# Altium PCB PCB1.PcbDoc
Units mm, origin at the board's own origin, x right, y up, seen from the top; angles counter-clockwise.
Board outline 152.4 x 101.6 mm, 2 copper layers (Top Layer, Bottom Layer); 18 components, 26 nets, 97 pads, 0 vias.
Unrouted connection lines stored in the file: 56.
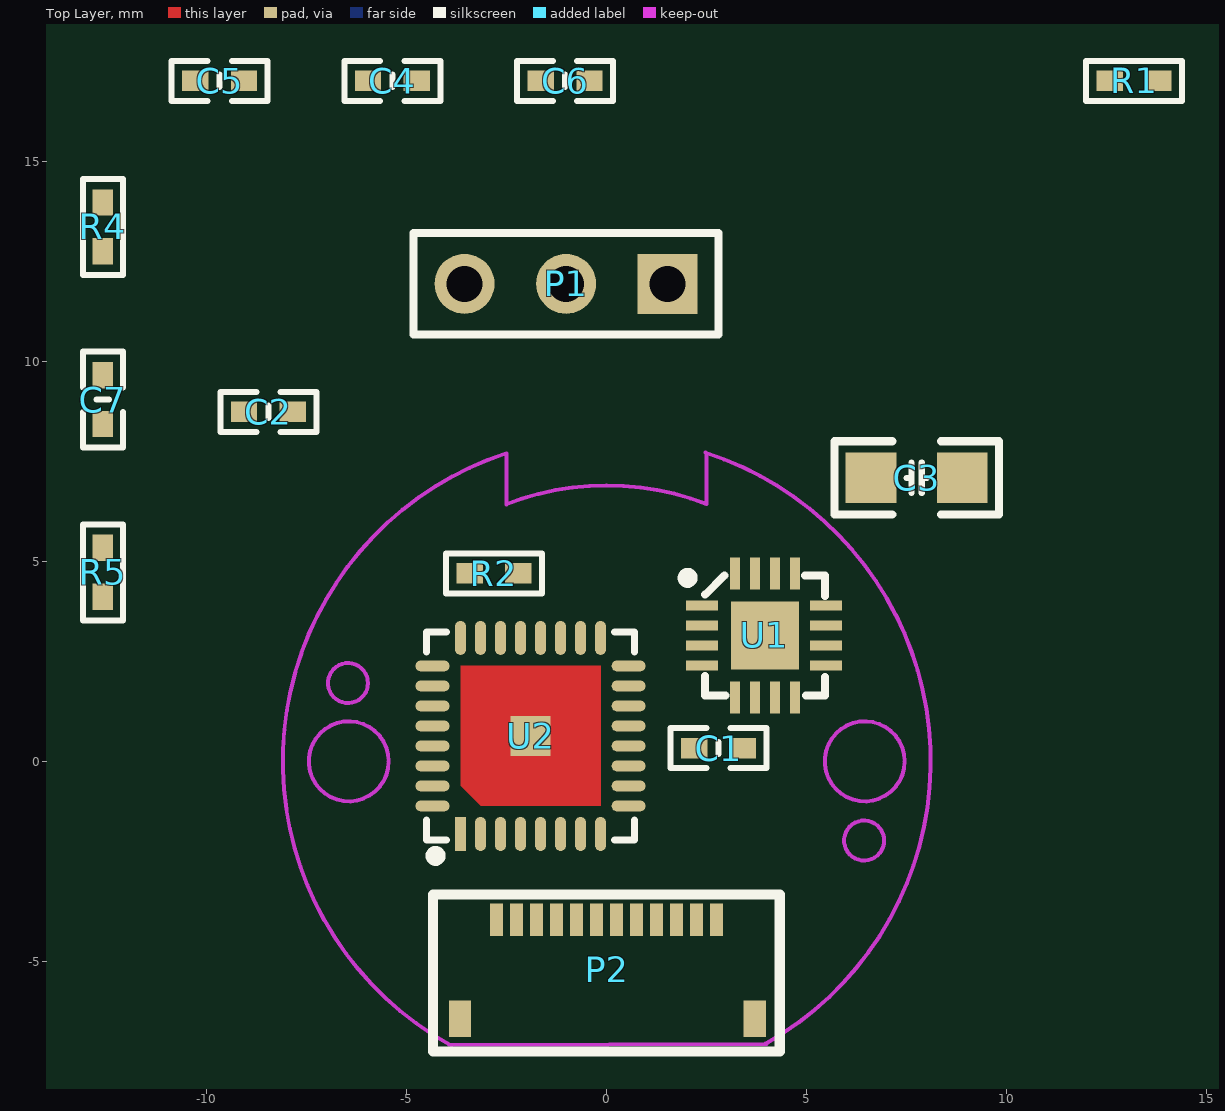
[diagram p0: Top Layer view]
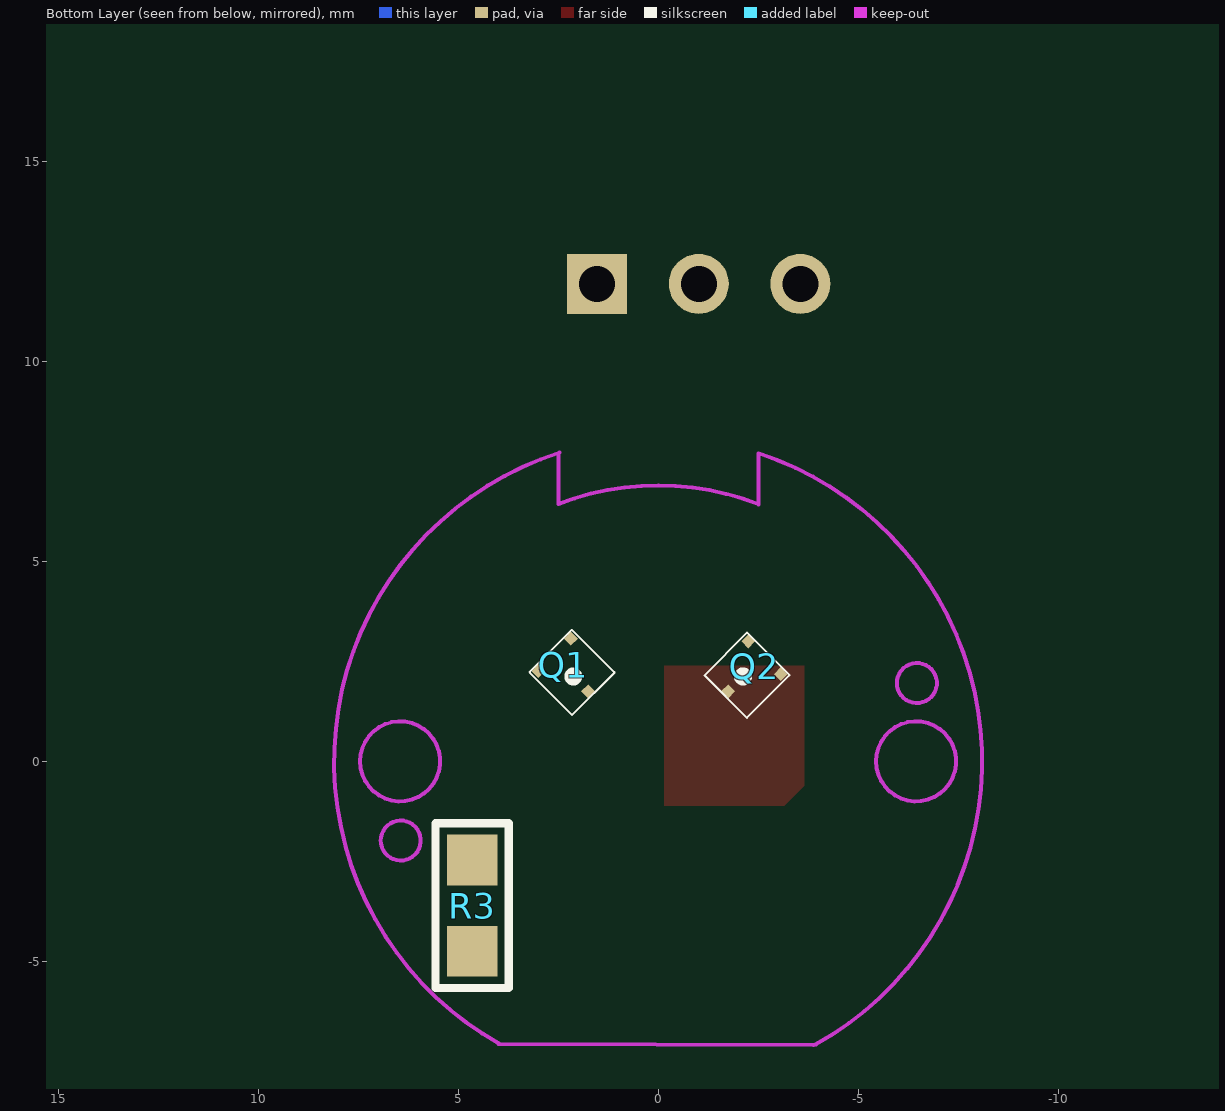
[diagram p1: Bottom Layer view, seen from below]

## Layer stack, top to bottom
Top Solder: solder mask 0.0102, Solder Resist, Dk 3.5
Top Layer: signal copper 0.0356
Dielectric 1: dielectric 0.32, FR-4, Dk 4.8
Bottom Layer: signal copper 0.0356
Bottom Solder: solder mask 0.0102, Solder Resist, Dk 3.5

## Board outline
-74.422,-55.245 77.978,-55.245 77.978,46.355 -74.422,46.355

## Design rules (kind name [scope] priority, off if disabled: settings)
Clearance [All] p1: gap=0.254 ignorepadtopadclearanceinfootprint=FALSE except(0: Arc-Hole Track-Hole SMDPad-Hole THPad-Hole Via-Hole Fill-Hole Poly-Hole Region-Hole Text-Hole)
PolygonConnect [All] p1: connectstyle=Relief reliefconductorwidth=0.254 reliefentries=4 polygonreliefangle="90 Angle" airgapwidth=0.254
RoutingVias [All] p1: holewidth=0.711 width=1.27 viastyle="Through Hole" minholewidth=0.711 minwidth=1.27 maxholewidth=0.711 maxwidth=1.27
SolderMaskExpansion [All] p1: expansion=0.102 istentingtop=FALSE
Width [All] p1: maxlimit=0.254 minlimit=0.254 preferedwidth=0.254
30 further rules are at their usual default settings.

## Classes and differential pairs
component class LKS_EVB_MCU072_V1.0: C1 C3 C4 C7 P1 Q1 Q2 R1 R2 R4 R5 U1 U2

## Components (designator, comment, footprint, x,y, rotation, side; value= is the part's Value field where it differs from the comment)
C1 "1uF/10V" "C 0402_M" 2.794,0.33 r180 top
C2 "104F/10V" "C 0402_M" -8.458,8.738 r0 top
C3 "22uF/16V" "C 0805_M" 7.747,7.087 r0 top
C4 "104/10V" "C 0402_M" -5.359,17.012 r0 top
C5 "10uF/10V" "C 0402_M" -9.677,17.012 r0 top
C6 "100nF/50V" "C 0402_M" -1.041,17.012 r0 top
C7 "1nF/50V" "C 0402_M" -12.598,9.042 r90 top
P1 "Header 3" HDR1X3 1.524,11.938 r180 top
P2 "Header 12" SMD-12 2.743,-3.962 r180 top
Q1 "MT9101DT" DFN1616 2.121,2.121 r315 bottom locked
Q2 "MT9101DT" DFN1616 -2.121,2.121 r45 bottom locked
R1 "1K1%" "R 0402_M" 13.183,17.012 r0 top value=K
R2 "1K1%" "R 0402_M" -2.819,4.699 r180 top value=K
R3 "0.100R/0805" "R 0805_M" 4.648,-3.607 r270 bottom
R4 "1K1%" "R 0402_M" -12.598,13.36 r90 top value=K
R5 "10R" "R 0402_M" -12.598,4.724 r90 top value=K
U1 "MS39233" QFN16 3.962,3.15 r0 top
U2 "LKS32MC072KBQ8" "QFN32 5x5_N" -1.905,0.635 r0 top

## Footprints (in the part's own frame and the unit in brackets; to place one, negate y for a bottom-side part, rotate by r counter-clockwise, add the part's x,y. Pads: shape width x height; smd on the part's side, far side on the other; paste and mask are expansions set on the pad)
"C 0402_M" [mil] "无极性贴片电容"
  rect 26x20 smd: 1(-24,0) 2(24,0)
  silkscreen extent -47,-20 47,20, body extent -20,-10 20,10, height 21
"C 0805_M" [mil] "无极性贴片电容"
  rect 50x50 smd: 1(-45,0) 2(45,0)
  silkscreen extent -81,-36 81,36, body extent -39,-24 39,24, height 20
DFN1616 [mm]
  rect 0.25x0.25 smd: 1(-0.625,-0.711) 2(0.525,-0.711) 3(0,0.525)
  silkscreen extent -0.8,-0.85 0.7,0.66
HDR1X3 [mm] "Connector; Header; 3 Position"
  rect 1.5x1.5 hole 0.9: 1(0,0)
  round 1.5 hole 0.9: 2(2.54,0) 3(5.08,0)
  silkscreen extent -1.27,-1.27 6.35,1.27
QFN16 [mm] "3mm*3mm"
  rect 0.8x0.25 smd: 1(-1.575,0.75) 2(-1.575,0.25) 3(-1.575,-0.25) 4(-1.575,-0.75) 9(1.524,-0.75) 10(1.524,-0.25) 11(1.524,0.25) 12(1.524,0.75)
  rect 0.25x0.8 smd: 5(-0.75,-1.55) 6(-0.25,-1.55) 7(0.25,-1.55) 8(0.75,-1.55) 13(0.75,1.55) 14(0.25,1.55) 15(-0.25,1.55) 16(-0.75,1.55)
  rect 1.7x1.7 smd: 17(0,0)
  silkscreen extent -2.07,-1.5 1.5,1.56, body extent -1.55,-1.52 1.49,1.52, height 0.9
"QFN32 5x5_N" [mm] "32脚，长x宽x高：5x5x0.95mm，脚距：0.5mm"
  rect 0.275x0.85 smd: 1(-1.751,-2.451)
  oval 0.275x0.85 smd: 2(-1.25,-2.451) 3(-0.75,-2.451) 4(-0.25,-2.451) 5(0.25,-2.451) 6(0.75,-2.451) 7(1.25,-2.451) 8(1.75,-2.451) 17(1.75,2.451) 18(1.25,2.451) 19(0.75,2.451) 20(0.25,2.451) 21(-0.25,2.451) 22(-0.75,2.451) 23(-1.25,2.451) 24(-1.75,2.451)
  oval 0.85x0.275 smd: 9(2.451,-1.75) 10(2.451,-1.25) 11(2.451,-0.75) 12(2.451,-0.25) 13(2.451,0.25) 14(2.451,0.75) 15(2.451,1.25) 16(2.451,1.75) 25(-2.451,1.75) 26(-2.451,1.25) 27(-2.451,0.75) 28(-2.451,0.25) 29(-2.451,-0.25) 30(-2.451,-0.75) 31(-2.451,-1.25) 32(-2.451,-1.75)
  rect 1x1 smd: 33(0,0)
  Top Layer region: -1.75,1.75 1.75,1.75 1.75,-1.75 -1.25,-1.75 -1.75,-1.25
  silkscreen extent -2.6,-3.12 2.6,2.6, body extent -2.5,-2.5 2.5,2.5, height 0.93
"R 0402_M" [mil] "1/16W贴片电阻"
  rect 26x20 smd: 1(-24,0) 2(24,0)
  silkscreen extent -47,-20 47,20, body extent -20,-10 20,10, height 12
"R 0805_M" [mil] "1/8W贴片电阻"
  rect 50x50 smd: 1(-45,0) 2(45,0)
  silkscreen extent -81,-36 81,36, body extent -39,-25 39,25, height 20
SMD-12 [mil]
  rect 22x36 smd: 0(252.38,97.5) 0/2(-37.62,97.5)
  rect 13x32 smd: 1(216.53,0) 2(196.85,0) 3(177.16,0) 4(157.48,0) 5(137.8,0) 6(118.11,0) 7(98.43,0) 8(78.74,0) 9(59.05,0) 10(39.37,0) 11(19.68,0) 12(0,0)
  silkscreen extent -62,-25 279,130

## Part data
C1 C2 C3 C4 C5 C6 C7: library part C, "Capacitor"
P1: "Header, 3-Pin", LatestRevisionDate=17-Jul-2002, LatestRevisionNote="Re-released for DXP Platform.", Publisher="Altium Limited"
P2: "Header, 12-Pin", LatestRevisionDate=17-Jul-2002, LatestRevisionNote="Re-released for DXP Platform.", Publisher="Altium Limited"
R1 R2 R4 R5: library part Res, "Resistor", LatestRevisionDate=17-Jul-2002, LatestRevisionNote="Re-released for DXP Platform.", PackageDescription="Axial Device, Thru-Hole; 2 Leads; 0.4 in Pin Spacing", PackageReference=AXIAL-0.4, Published=8-Jun-2000, Publisher="Altium Limited"
R3: library part RES2短
U2: library part LKS32MC072KBQ82, "LKS32MC072KBQ8 / 凌鸥创芯，128KFlash，12KRAM"

## Nets (pads, with @x,y where several pads share a name; then routed paths per layer and width w, separated by ;. In a path a pad name is that pad's centre, name@x,y a point inside that pad or via, vN(x,y) a via of type N, cw(c..) or ccw(c..) an arc to the next point about the centre after c; other vN are vias at no path point)
3.3V: C1.2 C2.2 C4.2 C5.2 P2.5 Q1.1 Q2.1 U1.16 U2.3
A_N: U1.13 U2.19
A_P: U1.12 U2.18
B_N: U1.15 U2.21
B_P: U1.14 U2.20
C_N: U1.1 U2.23
C_P: U1.2 U2.22
FAULT: U1.11 U2.17
GND: C1.1 C2.1 C3.1 C4.1 C5.1 C6.2 C7.1 P2.3 P2.4 P2.6 Q1.2 Q2.2 R2.1 R3.2 R5.2 U1.10 U1.17
LH_OUT_0: Q1.3 U2.5
LH_OUT_1: Q2.3 U2.6
NRST: C6.1 U2.2
OC: C7.2 R4.1 U2.12
OPA3_IN: R2.2 U2.26
OPA3_IP: R1.2 U2.27
PGND: R1.1 R3.1 R4.2 R5.1 U1.5 U1.6 U1.8
RXD0: P2.8 U2.13
SWCLK: P2.11 U2.31
SWDIO: P2.12 U2.32
TIM1_CH0: P2.10 U2.29
TIM1_CH1: P2.9 U2.30
TXD0: P2.7 U2.14
U: P1.1 U1.9
V: P1.2 U1.7
VDD: C3.2 P2.1 P2.2 U1.3
W: P1.3 U1.4
pads on no net: P2.0 P2.0/2 U2.1 U2.4 U2.7 U2.8 U2.9 U2.10 U2.11 U2.15 U2.16 U2.24 U2.25 U2.28 U2.33

## Keep-outs
Keep-Out Layer:
  circle w0.1: c-6.45,0 r1
  circle w0.1: c6.45,0 r1
  circle w0.1: c6.434,-1.981 r0.5
  circle w0.1: c-6.469,1.956 r0.5
  lines w0.1: -3.942,-7.076 cw(c0,0) -2.512,7.701 -2.512,6.422 ; -3.886,-7.087 3.988,-7.061 ; -2.512,6.426 cw(c0,0) 2.492,6.434 ; 2.468,7.715 cw(c0,0) 3.975,-7.058 ; 2.489,6.434 2.489,7.701

## Silkscreen, mask and mechanical layers (free items; w line width, h text height)
Mechanical 15:
  lines w0.025: -11.938,0 12.827,0 ; 0,-9.779 0,8.763
  lines w0.127: -2.121,2.121 0,0 ; -0.013,-0.013 2.121,2.121